# Altium PCB Copy of soldeerstation.PcbDoc
Units mil, origin at the board's own origin, x right, y up, seen from the top; angles counter-clockwise.
Board outline 7200 x 3300 mil, 2 copper layers (Top Layer, Bottom Layer); 64 components, 56 nets, 227 pads, 33 vias.
Unrouted connection lines stored in the file: 7.
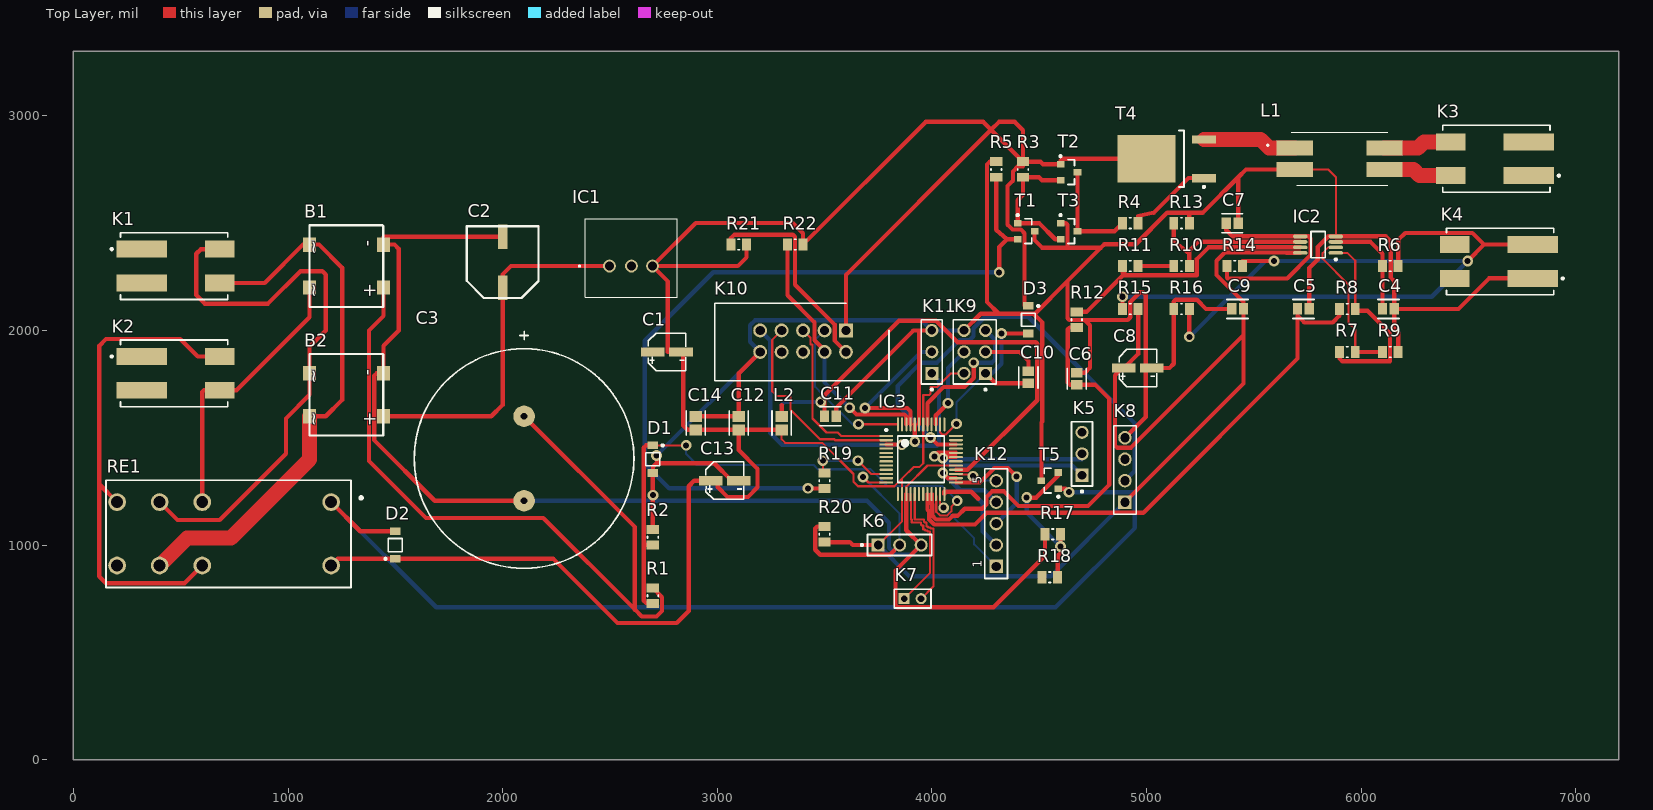
[diagram p0: Top Layer view]
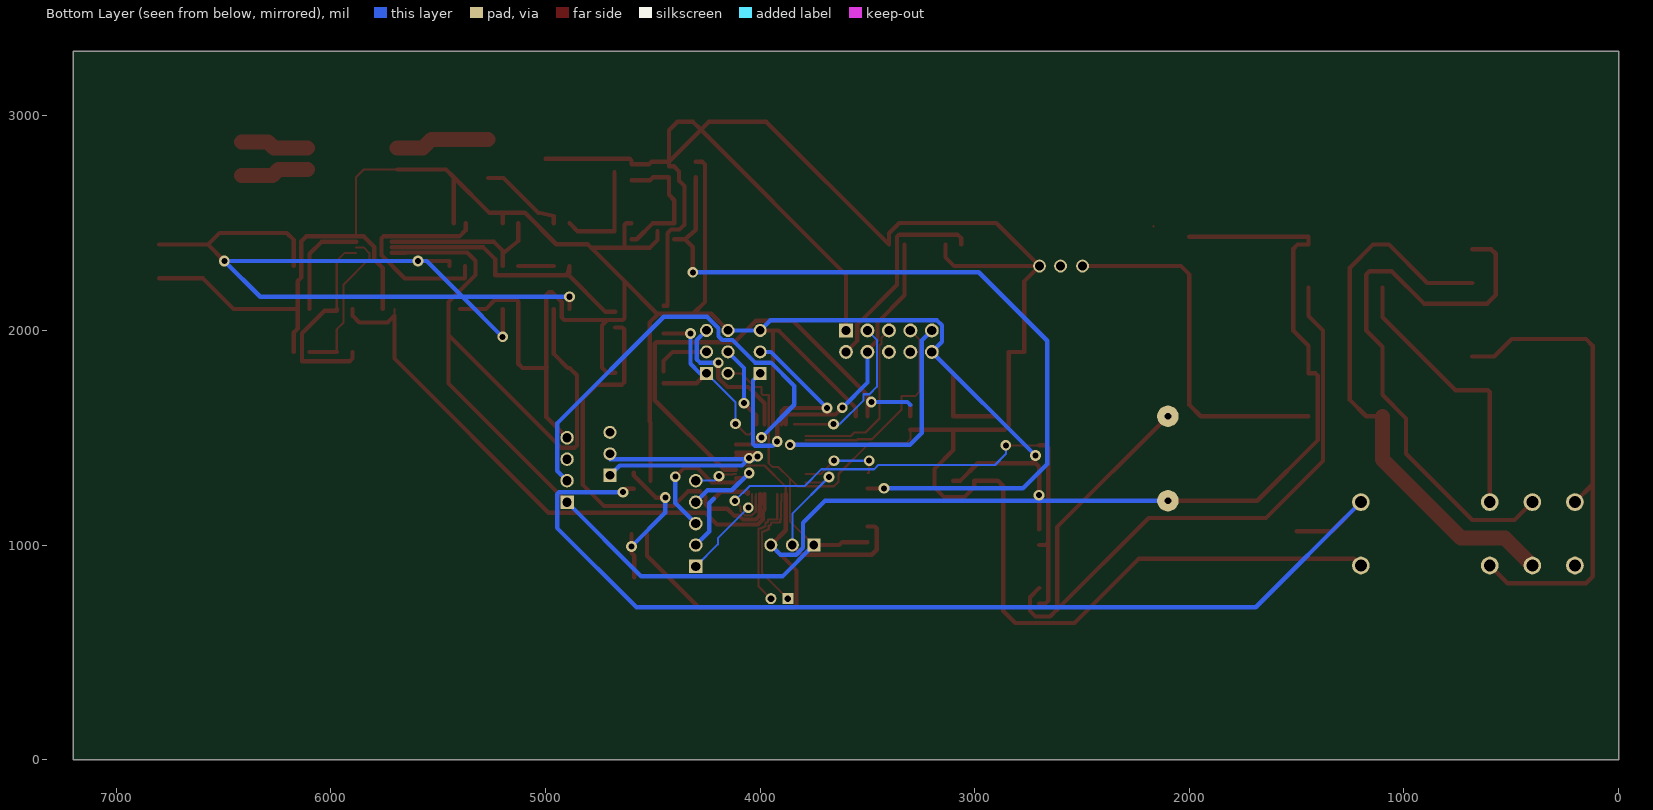
[diagram p1: Bottom Layer view, seen from below]

## Layer stack, top to bottom
Top Solder: solder mask 0.4, Solder Resist, Dk 3.5
Top Layer: signal copper 1.4
Dielectric 1: dielectric 12.6, FR-4, Dk 4.8
Bottom Layer: signal copper 1.4
Bottom Solder: solder mask 0.4, Solder Resist, Dk 3.5

## Board outline
0,0 7200,0 7200,3300 0,3300

## Design rules (kind name [scope] priority, off if disabled: settings)
Clearance [All] p1: gap=4 ignorepadtopadclearanceinfootprint=FALSE
PolygonConnect [All] p1: connectstyle=Relief reliefconductorwidth=10 reliefentries=4 polygonreliefangle="90 Angle" airgapwidth=10
RoutingVias [All] p1: holewidth=28 width=50 viastyle="Through Hole" minholewidth=28 minwidth=50 maxholewidth=28 maxwidth=50
SolderMaskExpansion [All] p1: expansion=4 istentingtop=FALSE
Width [All] p1: maxlimit=100 minlimit=10 preferedwidth=20 minimp=50.000000 maximp=50.000000 favimp=50.000000
30 further rules are at their usual default settings.

## Classes and differential pairs
component class voeding: B1 B2 C1 C2 C3 D1 D2 IC1 K1 K2 R1 R2 RE1
component class thermokoppel: C4 C5 C6 C7 C8 C9 IC2 K4 R6 R7 R8 R9 R10 R11 R12 R13 R14 R15 R16
component class PWM: K3 L1 R3 R4 R5 T1 T2 T3 T4
component class CPU: C10 C11 C12 C13 C14 D3 IC3 K5 K6 K7 K8 K9 K10 K11 K12 L2 R17 R18 R19 R20 R21 R22 T5

## Components (designator, comment, footprint, x,y, rotation, side; value= is the part's Value field where it differs from the comment)
B1 "Bridge_Rectifier" ttf 1270,2300 r270 top
B2 "Bridge_Rectifier" ttf 1270,1700 r270 top
C1 "10µf" D4L5.4#1 2759.88,1819.35 r0 top
C2 "100µf" CE_D8_L10 2000,2318.11 r270 top
C3 "4700µf" CE_D25_L25_plugin 2100,1206.3 r90 top
C4 "10n" CC_0805_m 6127.59,2100 r0 top value="0.22 μF"
C5 "10n" CC_0805_m 5731.53,2100 r0 top value="0.22 μF"
C6 "10n" CC_0805_m 4675,1775 r90 top value="0.22 μF"
C7 "10n" CC_0805_m 5400,2500 r0 top value="0.22 μF"
C8 "10µf" D4L5.4#2 4954.14,1744.36 r0 top
C9 "100n" CC_0805_m 5425,2100 r180 top value="0.22 μF"
C10 "100n" CC_0805_m 4450,1781.53 r90 top value="0.22 μF"
C11 "100n" CC_0805_m 3527.59,1600 r0 top value="0.22 μF"
C12 "100n" CC_0805_L 3100,1568.47 r90 top value="0.22 μF"
C13 "10µf" D4L5.4#2 3029.14,1219.36 r0 top
C14 "100n" CC_0805_L 2900,1568.47 r90 top value="0.22 μF"
D1 "Zener_Diode" SOD-123FL 2700,1400 r270 top
D2 "1N4007" SOD-123FL 1500,1000 r90 top value=15pF
D3 "1N4148" SOD-123FL 4450,2050 r270 top value=15pF
IC1 "OKI-78SR-5/1.5-W36-C" OKI78SR515W36C 2497.64,2300 r0 top
IC2 "Dual_Opamp" MSOP_8_M 5800,2400 r180 top
IC3 "ATMEGA4809" TQFP_48_M 3950,1400 r0 top
K1 "2060-452/998-404" WAGO-2060-452_V 500,2300 r0 top
K2 "2060-452/998-404" WAGO-2060-452_V 500,1800 r0 top
K3 "2060-452/998-404" WAGO-2060-452_V 6600,2800 r180 top
K4 "2060-452/998-404" WAGO-2060-452_V 6617.91,2321.26 r180 top
K5 "22-28-4033" MOLX-22-28-4033_V 4700,1425 r90 top
K6 "22-28-4033" MOLX-22-28-4033_V 3850,1000 r0 top
K7 "M22-2510205" FP-M22-2510205-MFG 3910.63,750 r0 top
K8 "61300411121" 61300411121 4900,1350 r90 top
K9 "TSW-103-07-G-D" SMTC-TSW-103-07-G-D_V 4200,1900 r90 top
K10 "5x2 box pinheader" "2x5 box pinheader" 3600,2000 r180 top
K11 "22-28-4033" MOLX-22-28-4033_V 4000,1900 r90 top
K12 "61300511121" 61300511121 4300,1100 r90 top
L1 "Common_Mode_Choke" 2545 5900,2800 r270 top
L2 "Choke" CC_0805_L 3300,1568.47 r270 top
R1 "68K" R_0805_M 2700,763.58 r90 top
R2 "10K" R_0805_M 2700,1036.42 r270 top
R3 "4K7" R_0805_M 4425,2750 r90 top
R4 "100 ohm" R_0805_M 4925,2500 r180 top
R5 "4K7" R_0805_M 4300,2750 r270 top
R6 "5K6" R_0805_M 6136.42,2300 r0 top
R7 "18K" R_0805_M 5936.42,1900 r0 top
R8 "5K6" R_0805_M 5936.42,2100 r0 top
R9 "100 ohm" R_0805_M 6136.42,1900 r0 top
R10 "18K" R_0805_M 5163.58,2300 r0 top
R11 "18K" R_0805_M 4925,2300 r0 top
R12 "5K6" R_0805_M 4675,2050 r270 top
R13 "100 ohm" R_0805_M 5163.58,2500 r0 top
R14 "5K6" R_0805_M 5411.42,2300 r0 top
R15 "1M" R_0805_M 4925,2100 r0 top
R16 "10M" R_0805_M 5163.58,2100 r0 top
R17 "4K7" R_0805_M 4563.58,1050 r0 top
R18 "10K" R_0805_M 4550,850 r0 top
R19 "10K" R_0805_M 3500,1300 r90 top
R20 "4K7" R_0805_M 3500,1050 r270 top
R21 "4K7" R_0805_M 3100,2400 r0 top
R22 "4K7" R_0805_M 3363.58,2400 r0 top
RE1 "RELAY_GENERAL_PURPOSE" RT42 1200.79,1052.36 r180 top
T1 "Transistor_NPN" SOT_23 4439.37,2462.6 r0 top
T2 "Transistor_NPN" SOT_23 4639.37,2737.4 r0 top
T3 "Transistor_PNP" SOT_23 4639.37,2462.6 r0 top
T4 "MOSFET_P" TO_252 5094.49,2800 r180 top
T5 "Transistor_NPN" SOT_23 4550,1300 r180 top

## Footprints (in the part's own frame and the unit in brackets; to place one, negate y for a bottom-side part, rotate by r counter-clockwise, add the part's x,y. Pads: shape width x height; smd on the part's side, far side on the other; paste and mask are expansions set on the pad)
"2x5 box pinheader" [mm]
  rect 1.65x1.65 hole 1.1: 1(0,0)
  round 1.65 hole 1.1: 2(0,2.54) 3(2.54,0) 4(2.54,2.54) 5(5.08,0) 6(5.08,2.54) 7(7.62,0) 8(7.62,2.54) 9(10.16,0) 10(10.16,2.54)
  silkscreen extent -5.08,-3.21 15.54,5.95, body extent -5.08,-3.2 15.24,5.74, height 9.15
2545 [mm]
  rect 1.78x4.27 smd: 1(-1.27,-5.305) 2(1.27,-5.305) 3(1.27,5.305) 4(-1.27,5.305)
  silkscreen extent -3.15,-8.6 3.15,5.69, body extent -3.15,-7.26 3.15,7.26, height 9.6
61300411121 [mm] "Pin Header, pitch 2.54 mm, THT, Vertical, single row, 4p"
  rect 1.6x1.6 hole 1.1: 1(-3.81,0)
  round 1.6 hole 1.1: 2(-1.27,0) 3(1.27,0) 4(3.81,0)
  silkscreen extent -5.23,-1.34 5.23,1.34, body extent -5.08,-1.27 5.08,1.27, height 8.57
61300511121 [mm] "Pin Header, pitch 2.54 mm, THT, Vertical, single row, 5p"
  rect 1.6x1.6 hole 1.1: 1(-5.08,0)
  round 1.6 hole 1.1: 2(-2.54,0) 3(0,0) 4(2.54,0) 5(5.08,0)
  silkscreen extent -6.5,-1.34 6.5,1.34, body extent -6.35,-1.27 6.35,1.27, height 8.57
CC_0805_L [mil]
  rect 51.36x57.33 smd paste+0 mask+0: 1(-31.53,0) 2(31.53,0)
  silkscreen extent -57,-44 57,44, body extent -67,-39 67,39, height 10
CC_0805_m [mil]
  rect 43.49x53.39 smd paste+0 mask+0: 1(-27.59,0) 2(27.59,0)
  silkscreen extent -49,-44 49,44, body extent -53,-32 53,32, height 10
CE_D8_L10 [mm]
  rect 2.9x1.1 smd: 1(-3,0) 2(3,0)
  Top Layer lines w0.254: -4.25,4.241 -4.259,4.25
  silkscreen extent -4.26,-4.25 4.25,4.25
CE_D25_L25_plugin [mm]
  round 2.54 hole 0.8: 1(0,0) 2(10,0)
  silkscreen extent -8,-13 20.07,13
D4L5.4#1 [mm]
  rect 2.8x1.1 smd: 1(-1.521,2.048) 1(-1.521,2.048) 2(1.8,2.048)
  silkscreen extent -2.08,-0.18 2.38,4.27
D4L5.4#2 [mm]
  rect 2.8x1.1 smd: 1(1.8,2.048) 2(-1.521,2.048)
  silkscreen extent -2.08,-0.18 2.38,4.27
FP-M22-2510205-MFG [mm]
  rect 1.3x1.3 hole 0.8 paste-1000 mask+0: 1(-1,0)
  round 1.3 hole 0.8 paste-1000 mask+0: 2(1,0)
  silkscreen extent -2.17,-1.1 2.18,1.1, body extent -2.27,-1.2 2.27,1.2, height 0.25
MOLX-22-28-4033_V [mm] "THD, 3-Leads, Body 7.62x2.49mm, Pitch 2.54mm"
  rect 1.55x1.55 hole 1.02: 1(-2.54,0)
  round 1.55 hole 1.02: 2(0,0) 3(2.54,0)
  silkscreen extent -4.58,-1.25 3.81,1.25, body extent -3.81,-1.24 3.81,1.24, height 8.38
MSOP_8_M [mm] "TSOP, 8-Leads, Body 3x3mm, Pitch 0.65mm, IPC Medium Density"
  oval 1.7x0.45 smd: 1(-2.1,0.975) 2(-2.1,0.325) 3(-2.1,-0.325) 4(-2.1,-0.975) 5(2.1,-0.975) 6(2.1,-0.325) 7(2.1,0.325) 8(2.1,0.975)
  silkscreen extent -2.22,-1.55 0.85,1.87, body extent -1.55,-1.55 1.55,1.55, height 1.1
OKI78SR515W36C [mm]
  round 1.519 hole 1.08: 1(0,0) 2(2.6,0) 3(5.1,0)
  silkscreen extent -3.6,-3.7 8.05,5.6, body extent -2.85,-3.7 8.05,5.6, height 16.6
R_0805_M [mm] "Chip Resistor, 2-Leads, Body 2.00x1.25mm, IPC Medium Density"
  rect 1.05x1.45 smd: 1(-0.925,0) 2(0.925,0)
  silkscreen extent -0.1,-0.62 0.1,0.62, body extent -1.1,-0.72 1.1,0.72, height 0.5
RT42 [mm]
  round 2.1 hole 1.4: 11(20.3,3.75) 12(15.26,3.75) 14(25.34,3.75) 21(20.3,-3.75) 22(15.26,-3.75) 24(25.34,-3.75) A1(0,3.75) A2(0,-3.75)
  silkscreen extent -3.67,-6.35 26.65,6.35, body extent -2.21,-6.35 26.79,6.35, height 15.86
SMTC-TSW-103-07-G-D_V [mm] "THD, 6-Leads, Body 7.62x5.08mm, Pitch 2.54mm"
  rect 1.55x1.55 hole 1.02: 1(-2.54,-1.27)
  round 1.55 hole 1.02: 2(-2.54,1.27) 3(0,-1.27) 4(0,1.27) 5(2.54,-1.27) 6(2.54,1.27)
  silkscreen extent -4.58,-2.54 3.81,2.54, body extent -3.81,-2.54 3.81,2.54, height 8.38
SOD-123FL [mm] "SOD, 2-Leads, Body 2.7x1.65mm"
  rect 0.91x1.22 smd: 1(-1.635,0) 2(1.635,0)
  silkscreen extent -1.76,-0.82 0.78,1.29, body extent -1.35,-0.82 1.35,0.82, height 1
SOT_23 [mm] "SOT23, 3-Leads, Body 2.92x1.3mm, Pitch 0.95mm"
  rect 0.9x0.8 smd: 1(-1,0.95) 2(-1,-0.95) 3(1,0)
  silkscreen extent -1.12,-1.46 0.65,2.02, body extent -0.65,-1.46 0.65,1.46, height 1.11
TO_252 [mm] "DPAK, 3-Leads, Body 6.5x6.12mm, Pitch 2.28mm, IPC Low Density"
  rect 2.85x1 smd: 1(-4.4,2.28) 3(-4.4,-2.28)
  rect 6.9x5.65 smd: 2(2.4,0)
  silkscreen extent -4.53,-3.35 -1.45,3.45, body extent -2.05,-3.32 4.17,3.32, height 2.35
TQFP_48_M [mm]
  rect 1.655x0.252 smd paste+0 mask+0: 1(-4.125,2.75)
  rrect100% 1.655x0.252 smd paste+0 mask+0: 2(-4.125,2.25) 3(-4.125,1.75) 4(-4.125,1.25) 5(-4.125,0.75) 6(-4.125,0.25) 7(-4.125,-0.25) 8(-4.125,-0.75) 9(-4.125,-1.25) 10(-4.125,-1.75) 11(-4.125,-2.25) 12(-4.125,-2.75) 25(4.125,-2.75) 26(4.125,-2.25) 27(4.125,-1.75) 28(4.125,-1.25) 29(4.125,-0.75) 30(4.125,-0.25) 31(4.125,0.25) 32(4.125,0.75) 33(4.125,1.25) 34(4.125,1.75) 35(4.125,2.25) 36(4.125,2.75)
  rrect100% 0.252x1.655 smd paste+0 mask+0: 13(-2.75,-4.125) 14(-2.25,-4.125) 15(-1.75,-4.125) 16(-1.25,-4.125) 17(-0.75,-4.125) 18(-0.25,-4.125) 19(0.25,-4.125) 20(0.75,-4.125) 21(1.25,-4.125) 22(1.75,-4.125) 23(2.25,-4.125) 24(2.75,-4.125) 37(2.75,4.125) 38(2.25,4.125) 39(1.75,4.125) 40(1.25,4.125) 41(0.75,4.125) 42(0.25,4.125) 43(-0.25,4.125) 44(-0.75,4.125) 45(-1.25,4.125) 46(-1.75,4.125) 47(-2.25,4.125) 48(-2.75,4.125)
  silkscreen extent -4.25,-2.75 2.75,3.58, body extent -5.2,-5.2 5.2,5.2, height 0.25
ttf [mm]
  rect 1.7x1.5 smd: 1(2.54,4.445) 2(-2.54,4.445) 3(-2.54,-4.318) 4(2.54,-4.318)
  silkscreen extent -4.83,-4.3 4.83,4.4
WAGO-2060-452_V [mm] "Terminal Block, 2-Leads, Body 12.7x7.9mm, Pitch 4mm"
  rect 6x2 smd: 1(-4.625,2) 2(-4.625,-2)
  rect 3.5x2 smd: MP1(4.625,2) MP2(4.625,-2)
  silkscreen extent -8.3,-3.95 5.57,3.95, body extent -7.12,-3.95 5.58,3.95, height 4.5

## Part data
B1 B2: Average Rectified Current-Max=0.8A, Forward Voltage=1V, Manufacturer="Diodes Inc", Package Description="4-Pin Small Outline Integrated Circuit, Body 4.7 x 3.8 mm, Pitch 2.5 mm", Package Reference=MiniDIP-4, Package Version=05/2016, Peak Current-Max=30A, Reverse Current-Max=5µA, Reverse Voltage-Max [Vrrm]=600V, Datasheet URL=http://www.diodes.com/_files/datasheets/ds17003.pdf, Datasheet Version="Rev. 13-2, 12/2010", Manufacturer URL=http://www.diodes.com/, Mounting Technology=SurfaceMount, Package URL=http://www.diodes.com/_files/packages/MiniDIP.pdf
C1 C2 C3 C8 C13: library part Capacitor_Electrolytic, Manufacturer=Panasonic, Max Operating Temperature="105 degC", Min Operating Temperature="-55 degC", Package Quantity=500, Voltage Rating="25 V", ComponentLink1Description="Manufacturer URL", ComponentLink1URL=http://www.panasonic.com/, ComponentLink2Description=Datasheet, ComponentLink2URL=http://industrial.panasonic.com/cdbs/www-data/pdf/RDE0000/ABA0000C1181.pdf, DatasheetVersion=03/2016, Height="10.2 mm", Lead Pitch="3.1 mm", Length="10.2 mm", Mount="Surface Mount", Mounting Technology="Surface Mount", PackageDescription="2-Pin Electrolytic Aluminum Capacitor, Body 8.3 x 8.3 mm", PackageReference=EEE-FK1E221P, Packaging="Tape and Reel", Pins=2, REACH SVHC="No SVHC", RoHSCompliant=true
C4 C5 C6 C7 C9 C10 C11 C12 C14: library part Capacitor_Ceramic, Capacitance="0.22 μF", Manufacturer=KEMET, Manufacturer Part Number=C0805C224K5RACTU, Package=C0805C-DN, Temperature="-55°C to +125°C", Temperature Characteristic=X7R, Temperature Coefficient=30ppm/°C, Temperature Range High=+125°C, Temperature Range Low=-55°C, Tolerance=0.1, Voltage Rating="50 V", Automotive=No, Category=Cap, ComponentLink2Description=Datasheet, ComponentLink2URL=https://content.kemet.com/datasheets/KEM_C1003_C0G_SMD.pdf, Device Class L1="Passive Components", Device Class L2=Capacitors, Device Class L3="Ceramic Capacitors", Digikey Description="CAP CER 0.22UF 50V X7R 0805", Height=0.88mm, Ipc Land Pattern Name=CAPC200125X78, Lead Free=Yes, Material=Ceramic, Mouser Description="CAP CER 0.22UF 50V X7R 0805", Octopart=https://octopart.com/c0805c224k5ractu-kemet-144670, RoHS=TRUE
D1: Manufacturer="On Semiconductor", PartNumber=1SMB5920BT3G, ComponentLink1Description="Manufacturer URL", ComponentLink1URL=http://www.onsemi.com/, ComponentLink2Description=Datasheet, ComponentLink2URL=http://www.onsemi.com/pub_link/Collateral/1SMB5913BT3-D.PDF, ComponentLink3Description="Package Specification", ComponentLink3URL=http://www.onsemi.com/pub_link/Collateral/1SMB5913BT3-D.PDF, DatasheetVersion="Rev. 8", Mounting Technology="Surface Mount", PackageDescription="2-Pin Small Molded Package, J-Bend Lead, Body 4.33 x 3.625 mm", PackageReference=SMB-2-403A-03_H, PackageVersion="Rev. H, 05/2011", Packing="Tape and Reel", RoHS=Pb-Free, VZ Typ (V)=6.2
D2: library part Diode, Capacitance=15pF, Forward Current=1A, Manufacturer=Diotec, Max Junction Temp=+175°C, Max Repetitive Reverse Voltage=1000V, Max Surge Forward Current=27A, Peak Reverse Current=5uA, Temperature="-50°C to +175°C", Temperature Range Low=-50°C, Automotive=No, Category=Diode, ComponentLink2Description=Datasheet, ComponentLink2URL=https://datasheet.octopart.com/1N4007-Diotec-datasheet-62346875.pdf, Device Class L1="Discrete Semiconductors", Device Class L2=Diodes, Device Class L3="Rectifier Diodes", Height=2.8mm, Ipc Land Pattern Name=DIOAD888W100L520D280, Lead Free=Yes, Manufacturer Part Number=1N4007, Octopart=https://octopart.com/1n4007-diotec-4040411, Package=1N4007, Reverse Voltage=1000V, RoHS=TRUE, Temperature Range High=+175°C
D3: library part Diode, Capacitance=15pF, Forward Current=1A, Manufacturer=Diotec, Manufacturer Part Number=1N4007, Max Junction Temp=+175°C, Max Repetitive Reverse Voltage=1000V, Max Surge Forward Current=27A, Peak Reverse Current=5uA, Temperature="-50°C to +175°C", Temperature Range Low=-50°C, Automotive=No, Category=Diode, ComponentLink2Description=Datasheet, ComponentLink2URL=https://datasheet.octopart.com/1N4007-Diotec-datasheet-62346875.pdf, Device Class L1="Discrete Semiconductors", Device Class L2=Diodes, Device Class L3="Rectifier Diodes", Height=2.8mm, Ipc Land Pattern Name=DIOAD888W100L520D280, Lead Free=Yes, Octopart=https://octopart.com/1n4007-diotec-4040411, Package=1N4007, Reverse Voltage=1000V, RoHS=TRUE, Temperature Range High=+175°C
IC1: "Non-Isolated DC/DC Converter, 7.5 W, 7 to 36 V, 1.5 A, -40 to 85 degC, 3-Pin THD, RoHS", Current - Output (Max)=1.5A, Manufacturer=Murata, Operating Temperature=-40degC~85degC, Package / Case=3-SIPModule, Power (Watts) - Manufacture Series=8W, Voltage - Input (Max)=36V, Voltage - Input (Min)=7V, Voltage - Isolation=-, Voltage - Output 1=5V, Applications=ITE(Commercial), Category=PowerSupplies-BoardMount, Datasheet URL=https://datasheet.ciiva.com/8006/1790439-8006672.pdf, Datasheet Version=Oct-13, Efficiency=90.5%, Family=DCDCConverters, Features=SCP, Manufacturer URL=http://www.murata.com/, Mounting Type=ThroughHole, Number of Outputs=1, Packaging=Tube, Power (Watts) - Max=8W, Series=Okami™OKI-78SR, Size / Dimension="0.41\"Lx0.30\"Wx0.65\"H(10.4mmx7.6mmx16.5mm)", Type=LinearRegulatorReplacement, Voltage - Output 2=-, Voltage - Output 3=-
IC2: Case/Package=PDIP, Input Bias Current=1pA, Input Offset Voltage (Vos)=4.5mV, Max Operating Temperature=125°C, Max Supply Voltage=6V, Min Operating Temperature=-40°C, Min Supply Voltage=1.8V, Nominal Supply Current=100uA, Operating Supply Voltage=5.5V, Output Current=23mA, Package Quantity=60, Power Supply Rejection Ratio (PSRR)=86dB, Voltage Gain=112dB, Amplifier Type="GENERAL PURPOSE", Bandwidth=1MHz, Common Mode Rejection Ratio=60dB, Gain Bandwidth Product=1MHz, Height=3.3mm, Input Offset Voltage-Max=4.5mV, Lead Free="Lead Free", Length=9.27mm, Mount="Through Hole", Number of Amplifiers=2, Number of Channels=2, Number of Circuits=2, Number of Elements=2, Number of Pins=8, Operating Supply Current=100uA, Output Current per Channel=23mA, Packaging=Rail/Tube, Radiation Hardening=No, REACH SVHC="No SVHC", RoHS Compliant=Yes, Slew Rate=0.6V/µs, Slew Rate-Nom=0.6V/µs, Supply Current=100uA, Technology=CMOS, Unity Gain Bandwidth Product=1MHz, Width=6.35mm
IC3: Case/Package=TQFP, Max Operating Temperature=85°C, Min Operating Temperature=-40°C, Core Architecture=AVR, Interface=I2C, Memory Size=48KB, Memory Type=FLASH, Mount="Surface Mount", Number of I/Os=41, Oscillator Type=Internal, Peripherals="Brown-out Detect/Reset", RoHS Compliant=Yes, Series="megaAVR® 0, Functional Safety (FuSa)"
K1 K2 K3 K4: library part WAGO-2060, "Terminal Block, Pitch 4 mm, 1 x 2 Position, Height 4.5 mm, -60 to 105 degC, RoHS, Tape and Reel", Colour=White, Manufacturer=WAGO, Nominal current=9A, Nominal voltage=160V, Package Description="Terminal Block, Pitch 4 mm, 1 x 2 Position, Height 4.5 mm", Package Reference=2060-452, AWG=24-18, Connection=Pullspring, Contact material=Tinplated, Content=1pc(s), Datasheet URL=http://www.wago.com/infomaterial/pdf/60255126.pdf, Datasheet Version=03/2015, Height=4.5mm, Length=7.9mm, Manufacturer part No.=2060-452/998-404, Manufacturer URL=http://global.wago.com/en/index-en.jsp, Material=PPA-GFenclosure·Tin-platedcoppercontacts, Max. cross section (flexible)=0.75mm², Max. cross section (inflexible)=0.75mm², Min. cross section (flexible)=0.25mm², Min. cross section (unflexible)=0.2mm², Mounting Technology=SurfaceMount, Number of contacts=2, Pitch=4mm, Stripping length=6-7mm, Type=2060-452/998-404, Width=10.1mm
K5 K6 K11: library part CMP-1676-00001-5, "Male Header, Pitch 2.54 mm, 1 x 3 Position, Height 8.38 mm, Tail Length 3.18 mm, RoHS, Bulk", Colour=Black, Current Rating="4 A", Manufacturer=Molex, Max Operating Temperature="75 degC", Min Operating Temperature="0 degC", Package Quantity=1, Voltage Rating="250 V", ComponentLink1Description="Manufacturer URL", ComponentLink1URL=http://www.molex.com/, ComponentLink2Description=Datasheet, ComponentLink2URL=http://www.molex.com/pdm_docs/sd/022284033_sd.pdf, Contact Finish=Gold, Contact material=Brass, Contact Plating=Gold, DatasheetVersion="Rev. G, 01/2012", Height="8.38 mm", Lead Pitch="0.1 inch", Length="7.62 mm", Mount="Through Hole", Mounting Technology="Through Hole", PackageDescription="Male Header, Pitch 2.54 mm, 1 x 3 Position, Height 8.38 mm, Tail Length 3.18 mm", PackageReference=22-28-4033, Packaging=Bulk, Pins=3, REACH SVHC=Unknown, RoHSCompliant=true, Rows=1
K7: library part CMP-15831-000005-1, "CONN HEADER VERT 2POS 2MM", Current Rating=2A, Manufacturer=Harwin, Package=0, Temperature="-40°C to +105°C", Temperature Range High=+105°C, Temperature Range Low=-40°C, Automotive=No, Category=Conn, ComponentLink2Description=Datasheet, ComponentLink2URL=https://cdn.harwin.com/pdfs/C018XX_M22_Series_Connectors.pdf, Conn Gender=Male, Conn Orientation=Vertical, Contact material=Gold,Nickel, Device Class L1=Connectors, Device Class L2="Headers and Wire Housings", Device Class L3=unset, Digikey Description="CONN HEADER VERT 2POS 2MM", Footprint Url=https://cdn.harwin.com/pdfs/M22-251.pdf, Height=5.45mm, Lead Free=Yes, Manufacturer Part Number=M22-2510205, Mouser Description="Headers & Wire Housings 2 PIN SIL VERTICAL GOLD PIN HEADER", Number of contacts=2, Number Of Rows=1, Octopart=https://octopart.com/m22-2510205-harwin-2538221, Pitch=2mm, RoHS=TRUE
K8: library part CMP-1502-01064-1, "THT Vertical Pin Header WR-PHD, Pitch 2.54 mm, Single Row, 4 pins", Contact Resistance=20mOhm, Manufacturer="Wurth Elektronik", Operating Temperature=-40to105degC, Rated Current=3A, Withstanding Voltage=500VAC, Working Voltage=250VAC, Datasheet URL=https://katalog.we-online.de/em/datasheet/6130xx11121.pdf, Gender=Male, Manufacturer URL=http://www.we-online.de, Mounting Technology=THT, Orientation=Vertical, Package Reference=61300411121, Packaging=Bag, Part Number=61300411121, Pin Number=4, Pitch=2.54mm, Publisher=WurthElektronik, Row Number=Single
K9: library part CMP-2000-07329-1, "Through Hole Header, Pitch 2.54 mm, 2 x 3 Position, Height 8.58 mm, Tail Length 2.54 mm, -55 to 125 degC, RoHS, Bulk", Color=Black, Manufacturer=Samtec-Inc., Package Description="Through Hole Header, Pitch 2.54 mm, 2 x 3 Position, Height 8.58 mm, Tail Length 2.54 mm", Category=Connectors,Interconnects, Connector Type=Header,Unshrouded, Contact Finish=Gold, Contact Finish Thickness=10µin(0.25µm), Contact Mating Length="0.230\"(5.84mm)", Contact Type=MalePin, Datasheet URL=http://suddendocs.samtec.com/catalog_english/tsw_th.pdf, Datasheet Version=12/2015, Family=RectangularConnectors-Headers,MalePins, Fastening Type=-, Features=-, Manufacturer URL=http://www.samtec.com/, Mounting Technology=ThroughHole, Mounting Type=ThroughHole, Number of Positions=6, Number of Positions Loaded=All, Number Of Rows=2, Package Reference=TSW-103-07-G-D, Package URL=http://suddendocs.samtec.com/prints/tsw-xxx-xx-xxx-x-xx-xxx-mkt.pdf, Packaging=Bulk, Pitch="0.100\"(2.54mm)", Row Spacing="0.100\"(2.54mm)", Series=TSW, Termination=Solder
K10: "Connector", Arrow Part Number=T821110A1S100CEU, Manufacturer_Name=Amphenol, Mouser Part Number=N/A, Arrow Price/Stock=https://www.arrow.com/en/products/t821110a1s100ceu/amphenol-fci?region=europe, Datasheet Link=https://docs.rs-online.com/e09c/0900766b81359cba.pdf, Height=9.15mm, Manufacturer_Part_Number=T821110A1S100CEU, Mouser Price/Stock=https://www.mouser.co.uk/ProductDetail/Amphenol/T821110A1S100CEU?qs=3IN%252Br8p6BrNf%2FuKCWm44Bg%3D%3D
K12: library part 5pin, "THT Vertical Pin Header WR-PHD, Pitch 2.54 mm, Single Row, 5 pins", Contact Resistance=20mOhm, Manufacturer="Wurth Elektronik", Operating Temperature=-40to105degC, Rated Current=3A, Withstanding Voltage=500VAC, Working Voltage=250VAC, Datasheet URL=https://katalog.we-online.de/em/datasheet/6130xx11121.pdf, Gender=Male, Manufacturer URL=http://www.we-online.de, Mounting Technology=THT, Orientation=Vertical, Package Reference=61300511121, Packaging=Bag, Part Number=61300511121, Pin Number=5, Pitch=2.54mm, Publisher=WurthElektronik, Row Number=Single
L1: Case/Package=1808, Current=2A, Current Rating=2.3A, DC Resistance (DCR)=60mR, Insulation Resistance=10MR, Max Operating Temperature=85°C, Max Voltage Rating (DC)=50V, Min Operating Temperature=-40°C, Package Quantity=1, Test Frequency=100MHz, DC Current=2A, DC Resistance-Max=60mR, Depth=4.7mm, Element Configuration=Dual, Height=2mm, Impedance=900R, Lead Free="Lead Free", Length=0.185inch, Max Current Rating=2A, Max DC Current=2A, Mount="Surface Mount", Number of Lines=2, Number of Pins=4, Packaging="Tape and Reel", Radiation Hardening=No, REACH SVHC="No SVHC", RoHS Compliant=Yes, Series=ACM, Termination=Flat, Voltage Rating=50V, Voltage Rating (DC)=50V, Width=4.5mm
L2: Case/Package=1350, Current Rating=8.5A, DC Resistance (DCR)=14.1mR, Inductance=10uH, Inductance Tolerance=20%, Max Operating Temperature=155°C, Min Operating Temperature=-40°C, Package Quantity=1, Ratings=AEC-Q200, Resistor Type=Wirewound, Saturation Current=10A, Self Resonant Frequency=18MHz, Series Resistance=14.1R, Test Frequency=100kHz, Height=4.7mm, Height - Seated (Max)=0.197inch, Length=0.512inch, Max DC Current=8.5A, Mount="Surface Mount", Packaging="Tape and Reel", RMS Current (Irms)=8.5A, RoHS Compliant=Yes, Series=WE-HCI, Shielding=Shielded, Termination=SMD/SMT, Tolerance=20%, Width=12.8mm
R1 R2 R3 R4 R5 R6 R7 R8 R9 R10 R11 R12 R13 R14 R15 R16 R17 R18 R19 R20 R21 R22: library part Resistor, Manufacturer="Vishay Dale", Part Number=CRCW08050000Z0EA
RE1: Ambient Temperature Range High=+85°C, Ambient Temperature Range Low=-40°C, Coil Power=403mW, Coil Resistance=62Ω, Coil Voltage=5V, Current Rating=8A, Manufacturer="TE Connectivity", Manufacturer Part Number=RT424005, Automotive=No, Category=Relay, Coil Type=Non-Latching, ComponentLink2Description=Datasheet, ComponentLink2URL=https://www.te.com/commerce/DocumentDelivery/DDEController?Action=showdoc&DocId=Data+Sheet%7FRT2%7F1014%7Fpdf%7FEnglish%7FENG_DS_RT2_1014.pdf%7F5-1393243-9, Device Class L1=Electromechanical, Device Class L2=Relays, Device Class L3="Power Relays", Digikey Description="RELAY GENERAL PURPOSE DPDT 8A 5V", Height=15.7mm, Lead Free=Yes, Mouser Description="General Purpose Relay, Rt2 Series, Power, Non Latching, Dpdt, 5 Vdc, 8 A Rohs Compliant: Yes", Number of contacts=2, Octopart=https://octopart.com/5-1393243-9-te+connectivity-41835766, Package=RT424005, RoHS=TRUE, Throw Configuration=DPDT
T1 T2 T5: Manufacturer="On Semiconductor", PartNumber=BC547C, ComponentLink1Description="Manufacturer URL", ComponentLink1URL=http://www.onsemi.com/, ComponentLink2Description=Datasheet, ComponentLink2URL=http://www.onsemi.com/pub_link/Collateral/BC546-D.PDF, ComponentLink3Description="Package Specification", ComponentLink3URL=http://www.onsemi.cn/pub_link/Collateral/2N6426-D.PDF, DatasheetVersion="Rev. 7", fT Min (MHz)=150, IC Continuous (A)=0.1, Mounting Technology="Through Hole", PackageDescription="3-Pin Transistor Outline, Body 4.825 x 3.685 mm, Pitch 1.27 mm", PackageReference=TO-92-3-29-11_AM_SL, PackageVersion="Rev. AM", Packing="Bulk Box", Polarity=NPN, RoHS=FALSE
T3: Manufacturer="On Semiconductor", PartNumber=BC557C, ComponentLink1Description="Manufacturer URL", ComponentLink1URL=http://www.onsemi.com/, ComponentLink2Description=Datasheet, ComponentLink2URL=http://www.onsemi.com/pub_link/Collateral/BC556B-D.PDF, ComponentLink3Description="Package Specification", ComponentLink3URL=http://www.onsemi.cn/pub_link/Collateral/2N6426-D.PDF, DatasheetVersion="Rev. 3", IC Continuous (A)=-0.1, Mounting Technology="Through Hole", PackageDescription="3-Pin Transistor Outline, Body 4.825 x 3.685 mm, Pitch 1.27 mm", PackageReference=TO-92-3-29-11_AM_SL, PackageVersion="Rev. AM", Packing="Bulk Box", Polarity=PNP, RoHS=FALSE
T4: Continuous Drain Current Id=2.4A, Current Temperature=25°C, Drain Source Voltage Vds=20V, Manufacturer="Fairchild Semiconductor", On Resistance Rds(on)=52mohm, Operating Temperature Max=150°C, Operating Temperature Min=-55°C, Operating Temperature Range=-55°Cto+150°C, Package / Case=SOT-23, Package Description="3-Pin Small Outline Transistor, Body 2.92 x 1.4 mm, Pitch 0.95 mm", Package Reference=SSOT3L, Package Version="Rev. 3, 05/2015", Power Dissipation Pd=500mW, Pulse Current Idm=10A, Rds(on) Test Voltage Vgs=-4.5V, Threshold Voltage Vgs Typ=-800mV, Voltage Vds Typ=-20V, Voltage Vgs th Max=-1.5V, Current Id Max=2.4A, Datasheet URL=https://www.fairchildsemi.com/datasheets/FD/FDN304P.pdf, Datasheet Version="Rev. C, 01/2001", External Depth=2.5mm, External Length / Height=1.12mm, External Width=3.05mm, Full Power Rating Temperature=25°C, Manufacturer URL=https://www.fairchildsemi.com/, Mounting Technology=SurfaceMount, No. of Pins=3, Package URL=https://www.fairchildsemi.com/package-drawings/MA/MA03B.pdf, Reel Quantity=3000, SMD Marking=304P, SVHC=NoSVHC(19-Dec-2012), Tape Width=8mm, Termination Type=SMD, Transistor Case Style=SOT-23, Transistor Polarity=PChannel, Voltage Vds=20V, Voltage Vgs Max=-800mV, Voltage Vgs Rds on Measurement=-4.5V

## Via types
v1: diameter 50, hole 28, Top Layer to Bottom Layer, 33 vias

## Nets (pads, with @x,y where several pads share a name; then routed paths per layer and width w, separated by ;. In a path a pad name is that pad's centre, name@x,y a point inside that pad or via, vN(x,y) a via of type N, cw(c..) or ccw(c..) an arc to the next point about the centre after c; other vN are vias at no path point)
+5: C1.2 C8.2 C9.1 C12.1 C13.2 C14.1 D2.1 D3.1 IC1.3 IC2.8 IC3.14 IC3.42 K6.1 K8.1 K9.2 K10.1 L2.2 R3.2 R15.2 R20.2 R21.2 R22.2 RE1.A1 T2.1 T4.2 | length 16777
  Top Layer w10: L2.2 3300,1493 3317.04,1475.96 3490.04,1475.96 3634.82,1331.18 3634.82,1295.18 3656,1274 3825,1274 3861.42,1310.42 ; K6.1 3861.42,1111.42 IC3.14 3861.42,1310.42 ; K9.2 4088.96,1800 4025.51,1736.55 3994,1736.55 3994,1705.04 3987.77,1698.81 3959.84,1698.81 IC3.42 3959.84,1381 3942.02,1363.18 3914.18,1363.18 3861.42,1310.42
  Top Layer w20: RE1.A1 1231.69,935.63 D2.1 2236.37,935.63 2535,637 2811,637 2867,693 2867,1274 2893,1300 C13.2 3003,1300 3003,1269 3048,1224 3143,1224 3188,1269 3188,1355 3100,1443 C12.1 ; R21.2 3136.42,2340.42 3096,2300 IC1.3 ; L2.2 C12.1 ; R20.2 3618,1013.58 3631.58,1000 K6.1 ; K10.1 3600,2259 4276.21,2935.21 ; D3.1 4432,2114.37 4432,2453 4415,2470 4376,2470 4353,2493 4353,2673 4378,2698 4378,2741 4402,2765 4425,2765 R3.2 ; K8.1 5452.59,1752.59 5452.59,1978.59 ; R15.2 4961.42,1889.75 4896.66,1825 C8.2 4888,1825 4854,1791 4854,1464 4864,1454 4928,1454 5452.59,1978.59 ; T4.2 4608,2800 4600,2792 T2.1 4517.61,2774.8 4506,2786.42 R3.2 ; IC2.8 5651.18,2361.61 5649.59,2363.2 5365.2,2363.2 5327,2325 5327,2258.59 5452.59,2133 C9.1 5452.59,1978.59 ; IC1.3 2770,2228.43 2770,1900 C1.2 2841,1900 2841,1557 2861.05,1536.95 C14.1 C12.1 ; IC1.3 2899.43,2501 3352,2501 3400,2453 R22.2 3972,2972 4239.42,2972 4276.21,2935.21 ; 4276.21,2935.21 R3.2 ; 4276.21,2935.21 4313,2972 4386,2972 4425,2933 R3.2
  Bottom Layer w20: K6.1 3896,854 4554,854 K8.1
+VIN: B1.1 C3.2 R1.2 | length 3752.8
  Top Layer w20: B1.1 1445,2068 1377,2000 1377,1392 1643,1126 2189,1126 2616,699 ; C3.2 2616,1084 2616,699 ; R1.2 2743,757 2743,693 2717,667 2648,667 2616,699
GND: B1.2 B2.2 C1.1 C2.1 C3.1 C4.2 C5.2 C6.2 C7.2 C8.1 C9.2 C11.2 C12.2 C13.1 C14.2 D1.2 IC1.2 IC2.4 IC3.15 IC3.29 IC3.43 K4.1 K6.3 K8.4 K9.6 K10.10 K11.3 L1.2 R2.1 R5.1 R9.2 R13.2 R16.1 R17.1 T1.3 T3.1 T5.3 | length 19613.4
  Top Layer w10: IC3.15 3881.1,1271.9 3979.68,1370.47 IC3.29 ; L1.2 5848,2750 5883,2715 5883,2438.39 IC2.4
  Top Layer w20: C2.1 1445,2436.22 B1.2 1496,2400 1516,2380 1516,2000 1445,1929 B2.2 1412,1800 1401,1789 1401,1489 1683.7,1206.3 C3.1 ; R2.1 D1.2 D1.2@2701,1335.63 ; v1(2701,1232) D1.2@2701,1335.63 ; v1(2717,1417) 2717,1397 2733,1381 ; C14.2 C12.2 3100,1800 K10.10 ; C13.1 3067,1300 2986,1381 2733,1381 ; C11.2 3555.18,1641.18 3914,2000 3940.16,2000 ; IC3.15 3881.1,1068.9 K6.3 3831,881 3831,719 3840,710 4287.17,710 4527.17,950 R17.1 ; IC3.43 3940.16,2000 ; K11.3 3940.16,2000 ; K9.6 4228,2078 4312,2078 ; R5.1 4270.42,2786.42 4257,2773 4257,2133 4312,2078 ; T1.3 4478.74,2421 4513.74,2386 4632,2386 ; T5.3 4510.63,1571 4515,1575.37 4515,2037 4474,2078 ; T3.1 4624,2500 4632,2492 4632,2386 ; C6.2 4713,1802.59 4737,1826.59 4737,2024 4712,2049 ; K8.4 4997,1597 C8.1@4997,1825 ; R13.2 5200,2549 ; C9.2 5278,2100 5235,2143 5136,2143 5127.17,2134.17 R16.1 5127.17,1845 5107.17,1825 C8.1 C8.1@4997,1825 ; C7.2 5427.59,2713.59 ; L1.2 5464,2750 5427.59,2713.59 ; C5.2 5759.12,2291 5798,2329.88 5798,2389 5847.39,2438.39 IC2.4 ; IC2.4@5883,2438.39 6115.61,2438.39 6138,2416 6138,2247 6155.18,2229.82 C4.2 ; R9.2 6172.83,1991 6155.18,2008.65 C4.2 ; K4.1 6596.52,2242.52 6454,2100 C4.2 ; D1.2@2701,1335.63 2701,1365 2717,1381 2733,1381 ; 4312,2078 4474,2078 ; 4474,2078 4480,2078 4632,2230 ; 4632,2230 4788,2386 ; 4632,2230 4632,2057 4640,2049 4712,2049 ; 4632,2386 4788,2386 ; 4712,2049 4913,2049 4925,2061 4925,2133 4970,2178 4984,2178 4997,2165 C8.1@4997,1830 ; 4788,2386 4804,2402 4950,2402 5097,2549 5200,2549 ; C8.1@4997,1825 C8.1@4997,1830 ; C8.1@4997,1825 4994.5,1827.5 C8.1@4997,1830 ; 5200,2549 5263,2549 5427.59,2713.59
  Bottom Layer w20: C3.1 2701,1206.3 ; v1(2701,1232) 2701,1206.3 ; v1(2717,1417) K10.10 3153,1947 3153,2024 3176,2047 3953,2047 K11.3 K9.6 ; K6.3 3905,955 3832,955 3800,987 3800,1104 3697.7,1206.3 2701,1206.3
NetB1_3: B1.3 B2.4 K1.MP2 RE1.11 | length 2592.3
  Top Layer w20: K1.MP2 891,2221.26 1069.74,2400 B1.3 1144,2400 1252,2292 1252,1676 1176,1600 B2.4
  Top Layer w70: RE1.11 529.85,1033 734,1033 1100,1399 B2.4
NetB1_4: B1.4 K2.MP2 RE1.22 | length 1296.1
  Top Layer w20: RE1.22 600,1713.26 608,1721.26 K2.MP2 760,1721.26 1100,2061.26 B1.4
NetB2_1: B2.1 C2.2 IC1.1 | length 1698.7
  Top Layer w20: B2.1 1947,1600 2000,1653 C2.2 2000,2261 2039,2300 IC1.1
NetB2_3: B2.3 K1.MP1 RE1.21 | length 2663.3
  Top Layer w20: RE1.21 484.57,1117 682,1117 990,1425 990,1590 1100,1700 B2.3 1100,1924 1176,2000 1176,2260 1160,2276 1057.87,2276 906.87,2125 612,2125 572,2165 572,2357 593.74,2378.74 K1.MP1
NetC4_1: C4.1 IC2.3 R6.1 | length 497.4
  Top Layer w20: IC2.3 6044.2,2412.8 6100,2357 R6.1 C4.1
NetC5_1: C5.1 IC3.20 R8.1 | length 2652.3
  Top Layer w10: 5703.94,2069 C5.1
  Top Layer w20: IC3.20 3979.53,1165 3988,1156.53 3988,1119 4011,1096 4201,1096 4255,1150 4985,1150 5703.94,1868.94 5703.94,2069 5735.94,2037 5868,2037 5900,2069 R8.1
NetC6_1: C6.1 IC3.21 R12.2 | length 1995.4
  Top Layer w20: IC3.21 3999.21,1191.68 4001.56,1189.34 4001.56,1137.44 4020,1118.99 4079.99,1118.99 4097,1136 4120,1136 4153,1169 4234.5,1169 4254.5,1189 4254.5,1224.5 4280,1250 4335.97,1250 4404,1181.97 4727.96,1181.97 4827.35,1281.36 4827.35,1680.06 4760,1747.41 C6.1 4643.59,1747.41 4634,1757 4634,2005 4642.58,2013.58 R12.2
NetC7_1: C7.1 IC2.5 R14.1 | length 1011
  Top Layer w20: C7.1 5372.41,2466.59 5400.61,2438.39 IC2.5 5755.61,2438.39 5765,2429 5765,2351 5656,2242 5378,2242 5375,2245 R14.1
NetC10_1: C10.1 D3.2 IC3.38 IC3.40 K9.1 | length 1008.3
  Top Layer w10: IC3.38 4038.58,1524.42 4048,1515 4065,1515 v1(4115,1565)
  Top Layer w20: K9.1 4296.06,1753.94 C10.1 ; v1(4325,1985.63) D3.2
  Bottom Layer w10: v1(4115,1565) 4115,1665 K9.1
  Bottom Layer w20: K9.1 4280,1800 4325,1845 v1(4325,1985.63)
NetC10_2: C10.2 K9.3 | length 266.3
  Top Layer w20: K9.3 4408,1900 4450,1858 C10.2
NetC11_1: C11.1 IC3.28 L2.1 | length 2311.7
  Top Layer w20: L2.1 3300,1653 ; v1(3482,1667) v1@3500,1667 ; C11.1 v1@3500,1667 ; IC3.28 4166.79,1350.79 4491,1675 4491,1938 4484,1945 4120,1945 4020,2045 3847,2045 3500,1698 v1@3500,1667
  Bottom Layer w20: 3300,1653 3314,1667 v1(3482,1667)
NetD1_1: D1.1 IC3.22 R1.1 R2.2 | length 2635.1
  Top Layer w10: D1.1 v1(2855,1464.37) ; IC3.22 4018.9,1228.97 4020.56,1228.97 4020.56,1155.34 4037.9,1137.99 4072,1137.99 4091,1156.99 4091,1179 v1(4118,1206)
  Top Layer w20: R1.1 2670.83,727.17 2657,741 2657,1013 ; R2.2 2670,1000 2657,1013 ; D1.1 2668.37,1464.37 2657,1453 2657,1013
  Bottom Layer w10: v1(2855,1464.37) 2855,1424 2906,1373 3449,1373 3468.71,1353.29 3714.9,1353.29 3793.57,1274.62 4049.38,1274.62 v1(4118,1206)
NetD2_2: D2.2 RE1.A2 T5.1 | length 4981.1
  Top Layer w20: RE1.A2 1336.42,1064.37 D2.2 ; T5.1 4622.4,1262.6 v1(4639,1246)
  Bottom Layer w20: RE1.A2 1690.79,710 4576,710 4946,1080 4946,1237 4937,1246 v1(4639,1246)
NetIC2_1: IC2.1 R7.1 R8.2 | length 945
  Top Layer w10: IC2.1 5936.22,2361.61 5972.83,2325 R8.2
  Top Layer w20: R7.1 5900,1869 5912,1857 6135,1857 6135,1987 6030,2092 5972.83,2092 R8.2
NetIC2_2: IC2.2 R7.2 R9.1 | length 723.1
  Top Layer w10: IC2.2 5848,2387.2 5821,2360.2 5821,2334 5941,2214 5941,2037 5972.83,2005.17 R7.2
  Top Layer w20: R7.2 R9.1
NetIC2_6: IC2.6 R10.2 R13.1 | length 784.1
  Top Layer w20: R13.1 5127.17,2416.83 5200,2357 ; R10.2 5200,2357 ; IC2.6 5240,2412.8 5200,2372.8 5200,2357
NetIC2_7: IC2.7 R11.1 R12.1 | length 1301.4
  Top Layer w20: R12.1 4720.42,2086.42 4895.79,2261.79 ; IC2.7 5289,2387.2 5235,2333.2 5235,2257 4900.58,2257 ; 4895.79,2261.79 4888.58,2269 R11.1 4900.58,2257 ; 4895.79,2261.79 4900.58,2257
NetIC3_1: IC3.1 K10.5 | length 811.4
  Top Layer w10: K10.5 3434.52,1965.48 3434.52,1934.52 3444,1934.52 3444,1589.75 3509.48,1524.27 3561.85,1524.27 3577.84,1508.27 IC3.1
NetIC3_2: IC3.2 K10.7 | length 965.3
  Top Layer w10: K10.7 3256,1956 3256,1716 3278,1694 3341.59,1694 3341.59,1630.41 3479,1493 3545,1493 3549.42,1488.58 IC3.2
NetIC3_3: IC3.3 K10.9 | length 1206.5
  Top Layer w20: IC3.3 3858.1,1468.9 v1(3860,1467)
  Bottom Layer w20: K10.9 3247,1953 3247,1522 3302,1467 v1(3860,1467)
NetIC3_10: IC3.10 R19.2 | length 385.8
  Top Layer w10: v1(3492,1393) 3492,1336.42 R19.2 ; v1(3656,1393) 3717.9,1331.1 IC3.10
  Bottom Layer w10: v1(3492,1393) v1(3656,1393)
NetIC3_12: IC3.12 K6.2 R20.1 | length 1073.9
  Top Layer w10: v1(3679,1317) 3679.73,1317 3705,1291.73 IC3.12
  Top Layer w20: R20.1 3466.42,1086.42 3457,1077 3457,978 3480,955 3805,955 K6.2
  Bottom Layer w10: v1(3679,1317) 3850,1146 K6.2
NetIC3_16: IC3.16 K7.1 | length 627.6
  Top Layer w10: K7.1 3992,870.74 3992,1062.62 3980.15,1062.62 3980.15,1067.14 3968.56,1067.14 3968.56,1072.77 3960.31,1072.77 3960.31,1091 3952.9,1091 3952.9,1094.04 3949.02,1094.04 3949.02,1105 3906.47,1105 3906.47,1119.62 3903.44,1119.62 3903.44,1202.01 3902.78,1202.01 3900.79,1204 IC3.16
NetIC3_17: IC3.17 K7.2 | length 599.1
  Top Layer w10: IC3.17 3920.47,1119 3963.02,1119 3963.02,1108.04 3966.9,1108.04 3966.9,1105 3974.31,1105 3974.31,1086.77 3982.56,1086.77 3982.56,1081.14 3994.15,1081.14 3994.15,1076.62 4008,1076.62 4008,808 K7.2
NetIC3_23: IC3.23 K12.1 | length 445.9
  Top Layer w10: IC3.23 4038.58,1190.42 v1(4055,1174)
  Bottom Layer w10: v1(4055,1174) 4197,1032 4197,1003 K12.1
NetIC3_24: IC3.24 K12.2 | length 432.2
  Top Layer w20: IC3.24 4058.27,1248 4184,1248 4216,1216
  Bottom Layer w20: 4216,1216 4237,1195 4237,1063 K12.2
NetIC3_25: IC3.25 K12.3 | length 585.9
  Top Layer w20: IC3.25 4224.14,1291.73 4291.41,1359 4355,1359 v1(4395.63,1318.37)
  Bottom Layer w20: K12.3 4395.63,1195.63 v1(4395.63,1318.37)
NetIC3_26: IC3.26 K12.4 | length 376.9
  Top Layer w20: v1(4051,1336) 4075.58,1311.42 IC3.26
  Bottom Layer w20: v1(4051,1336) 4132,1255 4245,1255 K12.4
NetIC3_27: IC3.27 K12.5 | length 203.8
  Top Layer w10: IC3.27 4126.02,1331.1 4126.02,1329.44 4178.01,1329.44 4178.01,1331.1 4181.9,1331.1 v1(4192,1321)
  Bottom Layer w10: v1(4192,1321) 4213,1300 K12.5
NetIC3_30: IC3.30 R18.1
NetIC3_31: IC3.31 K5.1 | length 745.6
  Top Layer w20: v1(4051,1405) 4055.84,1409.84 IC3.31
  Bottom Layer w20: v1(4051,1405) 4085,1371 4654,1371 K5.1
NetIC3_32: IC3.32 K5.2 | length 801
  Top Layer w20: v1(4011.83,1413.53) 4027.83,1429.53 IC3.32
  Bottom Layer w20: v1(4011.83,1413.53) 4025.36,1400 K5.2@4700,1400
NetIC3_33: IC3.33 K5.3
NetIC3_34: IC3.34 K8.2 | length 2187.8
  Top Layer w20: v1(3994,1501) 4026.1,1468.9 IC3.34
  Bottom Layer w20: v1(3994,1501) 3841,1654 3841,1741 3950,1850 4024,1850 4129,1955 4176.51,1955 4194.51,1973 4194.51,2010.51 4248,2064 4449,2064 4946,1567 4946,1346 K8.2
NetIC3_35: IC3.35 K8.3
NetIC3_39: IC3.39 K9.4 | length 391.9
  Top Layer w20: IC3.39 4018.9,1605 v1(4075,1661.1)
  Bottom Layer w20: v1(4075,1661.1) 4075,1825 K9.4
NetIC3_41: IC3.41 K9.5 | length 694.3
  Top Layer w20: IC3.41 3979.53,1660.53 4055,1736 4152,1736 4195,1779 v1(4195,1850)
  Bottom Layer w20: v1(4195,1850) 4280,1850 4296,1866 4296,1954 K9.5
NetIC3_44: IC3.44 K11.1 | length 547.5
  Top Layer w20: v1(3920.47,1482.2) IC3.44
  Bottom Layer w20: v1(3920.47,1482.2) 3940.67,1462 4024,1462 4033,1471 4033,1767 K11.1
NetIC3_45: IC3.45 K11.2 | length 698.1
  Top Layer w20: v1(3689,1639) 3884.79,1639 3900.79,1623 IC3.45
  Bottom Layer w20: v1(3689,1639) 3950,1900 K11.2
NetIC3_46: IC3.46 K10.4 R22.1 | length 1197.7
  Top Layer w20: R22.1 3327.17,2163.83 3453.52,2037.48 3453.52,1954 3500,1907.52 K10.4 ; v1(3617,1640) 3649,1608 3872,1608 3881.1,1598.9 IC3.46
  Bottom Layer w20: K10.4 3500,1757 v1(3617,1640)
NetIC3_47: IC3.47 K10.2 R21.1 | length 974.9
  Top Layer w20: R21.1 3063.58,2430.16 3080,2446.58 3352.42,2446.58 3362,2437 3362,2213 3547,2028 3547,1953 K10.2
NetIC3_48: IC3.48 K10.3 | length 755.7
  Top Layer w10: v1(3658,1563) 3841.73,1563 IC3.48
  Bottom Layer w10: K10.3 3456,1956 3456,1737 3490.49,1702.51 3517.88,1702.51 3517.88,1675.12 3630,1563 v1(3658,1563)
NetK2_MP1: K2.MP1 RE1.12 RE1.24 | length 2328.1
  Top Layer w20: RE1.24 120,1283.15 ; RE1.12 517.28,822 152,822 120,854 120,1283.15 ; K2.MP1 579,1878.74 497.74,1960 152,1960 120,1928 120,1283.15
NetK3_MP1: K3.MP1 L1.3 | length 321
  Top Layer w70: L1.3 6244.26,2750 6273,2721.26 K3.MP1
NetK3_MP2: K3.MP2 L1.4 | length 321
  Top Layer w70: L1.4 6265.26,2850 6294,2878.74 K3.MP2
NetK4_2: K4.2 R6.2 R14.2 R15.1 R16.2 | length 4371.1
  Top Layer w20: R15.1 v1(4888.58,2157) ; v1(5200,1970) R16.2 ; R14.2 5447.83,2324 v1(5595,2324) ; R6.2 6172.83,2421 6205.83,2454 6519,2454 6573,2400 ; v1(6497,2324) 6573,2400 ; K4.2 6573,2400
  Bottom Layer w20: v1(4888.58,2157) 5387,2157 ; v1(5200,1970) 5387,2157 ; 5387,2157 6330,2157 v1(6497,2324) v1(5595,2324) 5554,2324 5387,2157
NetL1_1: L1.1 T4.3 | length 439.9
  Top Layer w70: T4.3 5532.24,2889.76 5572,2850 L1.1
NetR3_1: R3.1 T1.1 T2.2 T3.2 | length 635.5
  Top Layer w20: T3.2 4574.8,2425.2 4500,2500 T1.1 4400,2607 4425,2632 R3.1 4499.42,2713.58 4513,2700 T2.2
NetR4_1: R4.1 T4.1 | length 407.8
  Top Layer w20: R4.1 4961.42,2533 5034.76,2549 5196,2710.24 T4.1
NetR4_2: R4.2 T2.3 T3.3 | length 500.1
  Top Layer w20: T2.3 T3.3 4851.18,2462.6 R4.2
NetR5_2: R5.2 R19.1 T1.2 | length 3773.7
  Top Layer w20: v1(3423,1264) 3423.42,1263.58 R19.1 ; R5.2 4300,2469.2 4350.2,2425.2 ; v1(4314,2271) 4314,2389 4350.2,2425.2 ; T1.2 4350.2,2425.2
  Bottom Layer w20: v1(3423,1264) 2776,1264 2662,1378 2662,1952 2981,2271 v1(4314,2271)
NetR10_1: R10.1 R11.2 | length 165.7
  Top Layer w20: R11.2 R10.1
NetR17_2: R17.2 R18.2 T5.2 | length 702.5
  Top Layer w20: v1(4442,1221) 4486.37,1221 4589.37,1324 T5.2 ; R18.2 4586.42,950 4600,963.58 v1(4600,993) R17.2
  Bottom Layer w20: v1(4442,1221) 4442,1151 v1(4600,993)
pads on no net: IC3.4 IC3.5 IC3.6 IC3.7 IC3.8 IC3.9 IC3.11 IC3.13 IC3.18 IC3.19 IC3.36 IC3.37 K1.1 K1.2 K2.1 K2.2 K3.1 K3.2 K4.MP1 K4.MP2 K10.6 K10.8 RE1.14

## Text inside footprints (layer, text, board x,y; h text height)
B1: Top Overlay "+" at 1355,2220 h60 r270; Top Overlay "-" at 1350.01,2420 h60 r270; Top Overlay "~" at 1095.02,2220 h60 r270; Top Overlay "~" at 1095.02,2420 h60 r270
B2: Top Overlay "+" at 1355,1620 h60 r270; Top Overlay "-" at 1350.01,1820 h60 r270; Top Overlay "~" at 1095.02,1620 h60 r270; Top Overlay "~" at 1095.02,1820 h60 r270
K12: Top Overlay "1" at 4233.07,895.28 h40 r90; Top Overlay "5" at 4233.07,1285.04 h40 r90